# EAGLE board Jogo dos numeros (EAGLE 7.6.0)

Size 73.58 x 317.39 mm. Coordinates in mm from the lower left corner, seen from the top.
Outline: 0,0 56.82,0 56.82,53.33 0,53.33 0,0
Copper layers (1*16): Top 0.035mm / dielectric 1.5mm / Bottom 0.035mm
Design rules "default": minimum track width 10mil, minimum drill 24mil, track to track 8mil, track to pad 8mil, pad to pad 8mil, via to via 8mil, smd to smd 8mil, copper to edge 40mil, drill to drill 8mil, minimum pad ring 10mil, minimum via ring 8mil, stop-mask expansion 4mil, vias tented up to drill 0mil, thermal gap 10mil

## Footprints (pad centres in the part's own frame; a part is rotated, then mirrored left to right if it is on the bottom)
HDSP-M = drill 0.813 long: 1 -5.08,-7.62; 2 -2.54,-7.62; 3 0,-7.62; 4 2.54,-7.62; 5 5.08,-7.62; 6 5.08,7.62; 7 2.54,7.62; 8 0,7.62; 9 -2.54,7.62; 10 -5.08,7.62
0207/10 = drill 0.813 octagon: 1 -5.08,0; 2 5.08,0
B25V = drill 0.813 long: A 2.54,0.635; E -2.54,0.635; S 0,0.635
ARDUINO_UNO = drill 1.016 pad 1.88: 0 63.5,50.8; 1 60.96,50.8; 2 58.42,50.8; 3 55.88,50.8; 3.3V 35.56,2.54; 4 53.34,50.8; 5 50.8,50.8; 5V 38.1,2.54; 6 48.26,50.8; 7 45.72,50.8; 8 41.656,50.8; 9 39.116,50.8; 10 36.576,50.8; 11 34.036,50.8; 12 31.496,50.8; 13 28.956,50.8; A0 50.8,2.54; A1 53.34,2.54; A2 55.88,2.54; A3 58.42,2.54; A4 60.96,2.54; A5 63.5,2.54; AREF 23.876,50.8; GND 26.416,50.8; GND. 43.18,2.54; GND.. 40.64,2.54; I/OREF 30.48,2.54; N/C 27.94,2.54; RESET 33.02,2.54; SCL 18.796,50.8; SDA 21.336,50.8; VIN 45.72,2.54 | hole 3.2: 66.04,7.62; 66.04,35.56; 15.24,50.8; 13.97,2.54
1X16P-2.54-2.54-11.6-3.0-BLACK-MALE = drill 0.889 pad 1.651 square: 1 0,19.05 | drill 0.889 pad 1.651: 2 0,16.51; 3 0,13.97; 4 0,11.43; 5 0,8.89; 6 0,6.35; 7 0,3.81; 8 0,1.27; 9 0,-1.27; 10 0,-3.81; 11 0,-6.35; 12 0,-8.89; 13 0,-11.43; 14 0,-13.97; 15 0,-16.51; 16 0,-19.05
DIL16 = drill 0.813 long: 1 -8.89,-3.81; 2 -6.35,-3.81; 3 -3.81,-3.81; 4 -1.27,-3.81; 5 1.27,-3.81; 6 3.81,-3.81; 7 6.35,-3.81; 8 8.89,-3.81; 9 8.89,3.81; 10 6.35,3.81; 11 3.81,3.81; 12 1.27,3.81; 13 -1.27,3.81; 14 -3.81,3.81; 15 -6.35,3.81; 16 -8.89,3.81

## Placement (x,y rotation side)
DigitDisplay CPU2  [HDSP-M]  5,35.48 0 top
DigitDisplay Player4  [HDSP-M]  5,22.78 0 top
R1  1k‎Ω  [0207/10]  5,225.98 0 top
R2  1k‎Ω  [0207/10]  5,98.98 0 top
R3  1k‎Ω  [0207/10]  5,238.68 0 top
R4  1k‎Ω  [0207/10]  5,251.38 0 top
R5  1k‎Ω  [0207/10]  5,302.18 0 top
R9  1k‎Ω  [0207/10]  5,137.08 0 top
R10  1k‎Ω  [0207/10]  5,149.78 0 top
R11  1k‎Ω  [0207/10]  5,162.48 0 top
R12  1k‎Ω  [0207/10]  5,175.18 0 top
R13  1k‎Ω  [0207/10]  5,187.88 0 top
R14  1k‎Ω  [0207/10]  5,200.58 0 top
R15  1k‎Ω  [0207/10]  5,213.28 0 top
R19  1k‎Ω  [0207/10]  5,86.28 0 top
R20  1k‎Ω  [0207/10]  5,111.68 0 top
R21  1k‎Ω  [0207/10]  5,124.38 0 top
Rpot2  250k‎Ω  [B25V]  5,289.48 0 top
RpotPlayer Controller1  250k‎Ω  [B25V]  5,48.18 0 top
U1  [ARDUINO_UNO]  5,10.08 0 top
U2  [ARDUINO_UNO]  5,264.08 0 top
U3  [1X16P-2.54-2.54-11.6-3.0-BLACK-MALE]  5,276.78 0 top
UCPU Decoder  [DIL16]  5,60.88 0 top
UPlayer Decoder  [DIL16]  5,73.58 0 top

## Library data of the parts
DigitDisplay CPU2 DigitDisplay Player4 R1-R5 R9-R15 R19-R21 Rpot2 RpotPlayer Controller1 U1-U3 UCPU Decoder UPlayer Decoder = AUTODESK_CIRCUITS_BREADBOARD

## Nets
N$1: RpotPlayer Controller1.S U1.A0
N$2: R9.2 UPlayer Decoder.9
N$3: U1.3 UCPU Decoder.7
N$4: R19.2 UCPU Decoder.12
N$5: R4.2 UCPU Decoder.13
N$6: R3.2 UCPU Decoder.14
N$7: U1.4 UCPU Decoder.1
N$8: U1.2 UCPU Decoder.2
N$9: R1.2 UCPU Decoder.15
N$10: U1.5 UCPU Decoder.6
N$11: U1.7 UPlayer Decoder.1
N$12: U1.8 UPlayer Decoder.2
N$13: U1.9 UPlayer Decoder.6
N$14: U1.6 UPlayer Decoder.7
N$15: R15.2 UPlayer Decoder.15
N$16: R13.2 UPlayer Decoder.13
N$17: R12.2 UPlayer Decoder.12
N$18: R14.2 UPlayer Decoder.14
N$19: R11.2 UPlayer Decoder.11
N$20: R10.2 UPlayer Decoder.10
N$21: R2.2 UCPU Decoder.11
N$22: R21.2 UCPU Decoder.10
N$23: R20.2 UCPU Decoder.9
N$24: DigitDisplay Player4.6 R12.1
N$25: DigitDisplay Player4.4 R11.1
N$26: DigitDisplay Player4.7 R13.1
N$27: DigitDisplay Player4.2 R10.1
N$28: DigitDisplay Player4.9 R15.1
N$29: DigitDisplay Player4.1 R9.1
N$30: DigitDisplay Player4.10 R14.1
N$32: DigitDisplay CPU2.1 R20.1
N$33: DigitDisplay CPU2.2 R21.1
N$34: DigitDisplay CPU2.4 R2.1
N$35: DigitDisplay CPU2.6 R19.1
N$36: DigitDisplay CPU2.7 R4.1
N$37: DigitDisplay CPU2.10 R3.1
N$38: DigitDisplay CPU2.9 R1.1
N$39: U1.13 UPlayer Decoder.3
N$40: U1.12 UPlayer Decoder.4
N$41: U1.11 UCPU Decoder.3
N$42: U1.10 UCPU Decoder.4
N$43: RpotPlayer Controller1.E U1.5V UCPU Decoder.16 UPlayer Decoder.16
N$44: DigitDisplay CPU2.3 DigitDisplay CPU2.5 DigitDisplay CPU2.8 DigitDisplay Player4.3 DigitDisplay Player4.5 DigitDisplay Player4.8 RpotPlayer Controller1.A U1.GND.. UCPU Decoder.5 UCPU Decoder.8 UPlayer Decoder.5 UPlayer Decoder.8
N$45: U1.1 U2.0
N$46: U1.0 U2.1
N$47: R5.1 Rpot2.A U2.5V U3.2
N$48: Rpot2.E U2.GND.. U3.1 U3.5 U3.16
N$49: Rpot2.S U3.3
N$50: U2.4 U3.4
N$51: U2.3 U3.6
N$52: U2.13 U3.11
N$53: U2.12 U3.12
N$54: U2.11 U3.13
N$55: U2.10 U3.14
N$56: R5.2 U3.15
N$57: U1.GND. U2.GND.

## Tracks (layer width: path | path; a pad name or v marks a point on that pad's centre or on a via)
N$1  (1 unrouted)
N$2  (1 unrouted)
N$3  (1 unrouted)
N$4  (1 unrouted)
N$5  (1 unrouted)
N$6  (1 unrouted)
N$7  (1 unrouted)
N$8  (1 unrouted)
N$9  (1 unrouted)
N$10  (1 unrouted)
N$11  (1 unrouted)
N$12  (1 unrouted)
N$13  (1 unrouted)
N$14  (1 unrouted)
N$15  (1 unrouted)
N$16  (1 unrouted)
N$17  (1 unrouted)
N$18  (1 unrouted)
N$19  (1 unrouted)
N$20  (1 unrouted)
N$21  (1 unrouted)
N$22  (1 unrouted)
N$23  (1 unrouted)
N$24  (1 unrouted)
N$25  (1 unrouted)
N$26  (1 unrouted)
N$27  (1 unrouted)
N$28  (1 unrouted)
N$29  (1 unrouted)
N$30  (1 unrouted)
N$32  (1 unrouted)
N$33  (1 unrouted)
N$34  (1 unrouted)
N$35  (1 unrouted)
N$36  (1 unrouted)
N$37  (1 unrouted)
N$38  (1 unrouted)
N$39  (1 unrouted)
N$40  (1 unrouted)
N$41  (1 unrouted)
N$42  (1 unrouted)
N$43  (3 unrouted)
N$44  (11 unrouted)
N$45  (1 unrouted)
N$46  (1 unrouted)
N$47  (3 unrouted)
N$48  (4 unrouted)
N$49  (1 unrouted)
N$50  (1 unrouted)
N$51  (1 unrouted)
N$52  (1 unrouted)
N$53  (1 unrouted)
N$54  (1 unrouted)
N$55  (1 unrouted)
N$56  (1 unrouted)
N$57  (1 unrouted)